# Altium PCB PCB-MAKEY_MAKEY_PTITTEAM_v1.0.PcbDoc
Units mil, origin at the board's own origin, x right, y up, seen from the top; angles counter-clockwise.
Board outline 3543.31 x 1968.5 mil, 2 copper layers (Top Layer, Bottom Layer); 48 components, 59 nets, 150 pads, 24 vias.
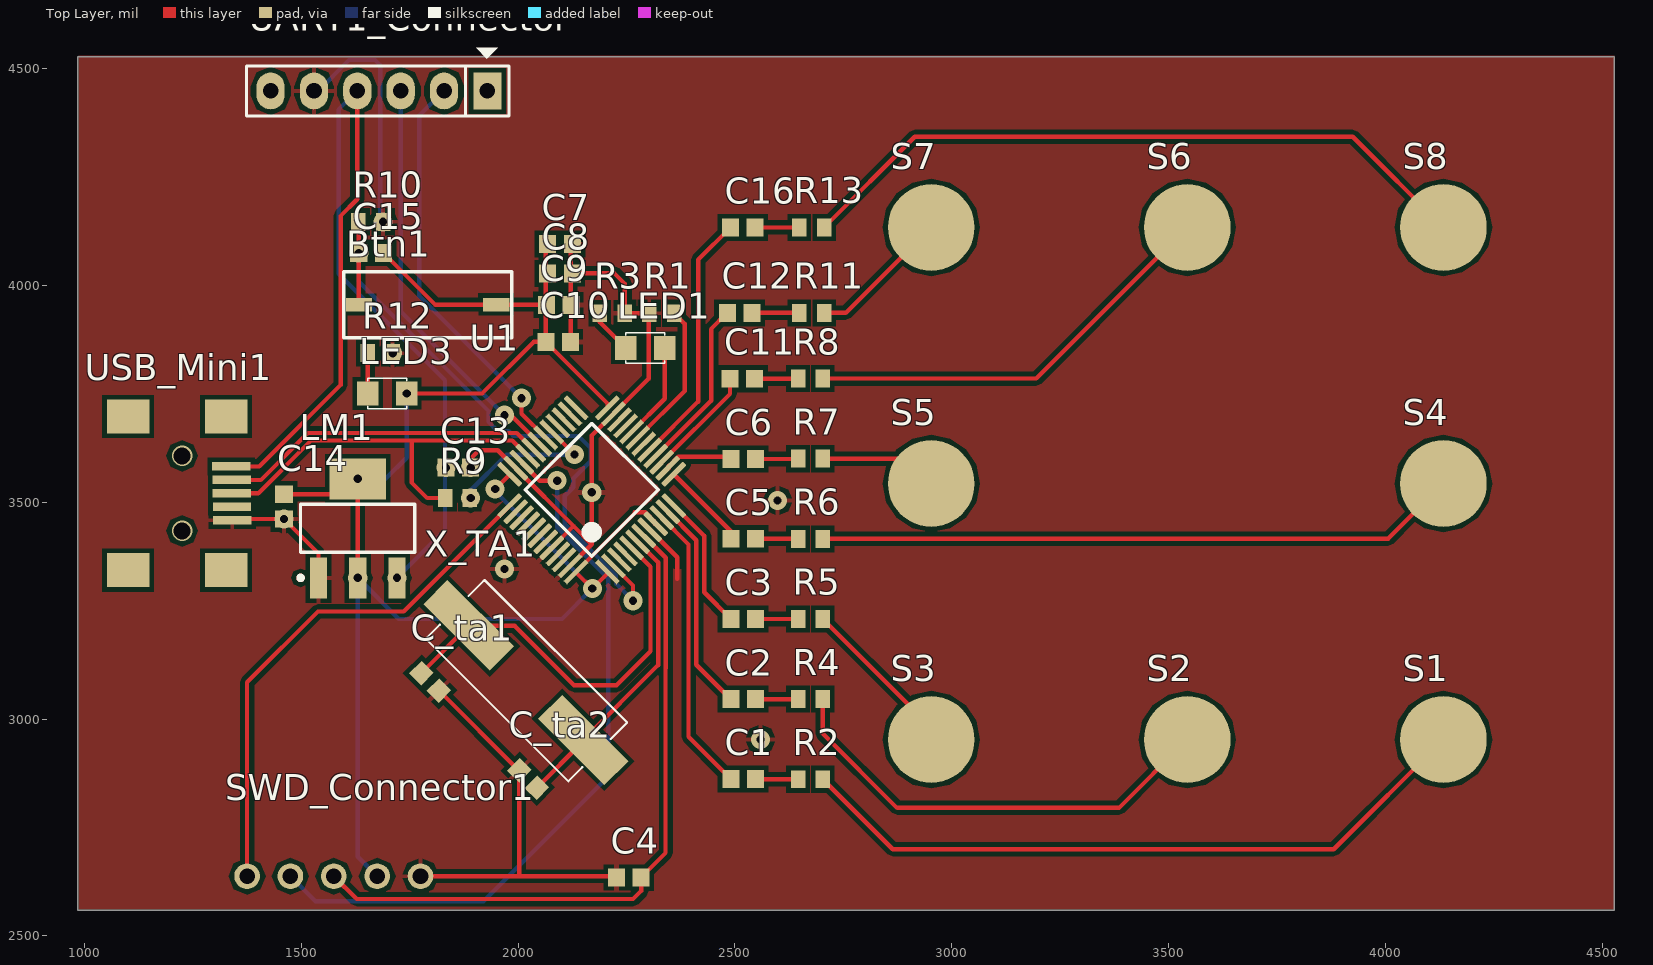
[diagram p0: Top Layer view]
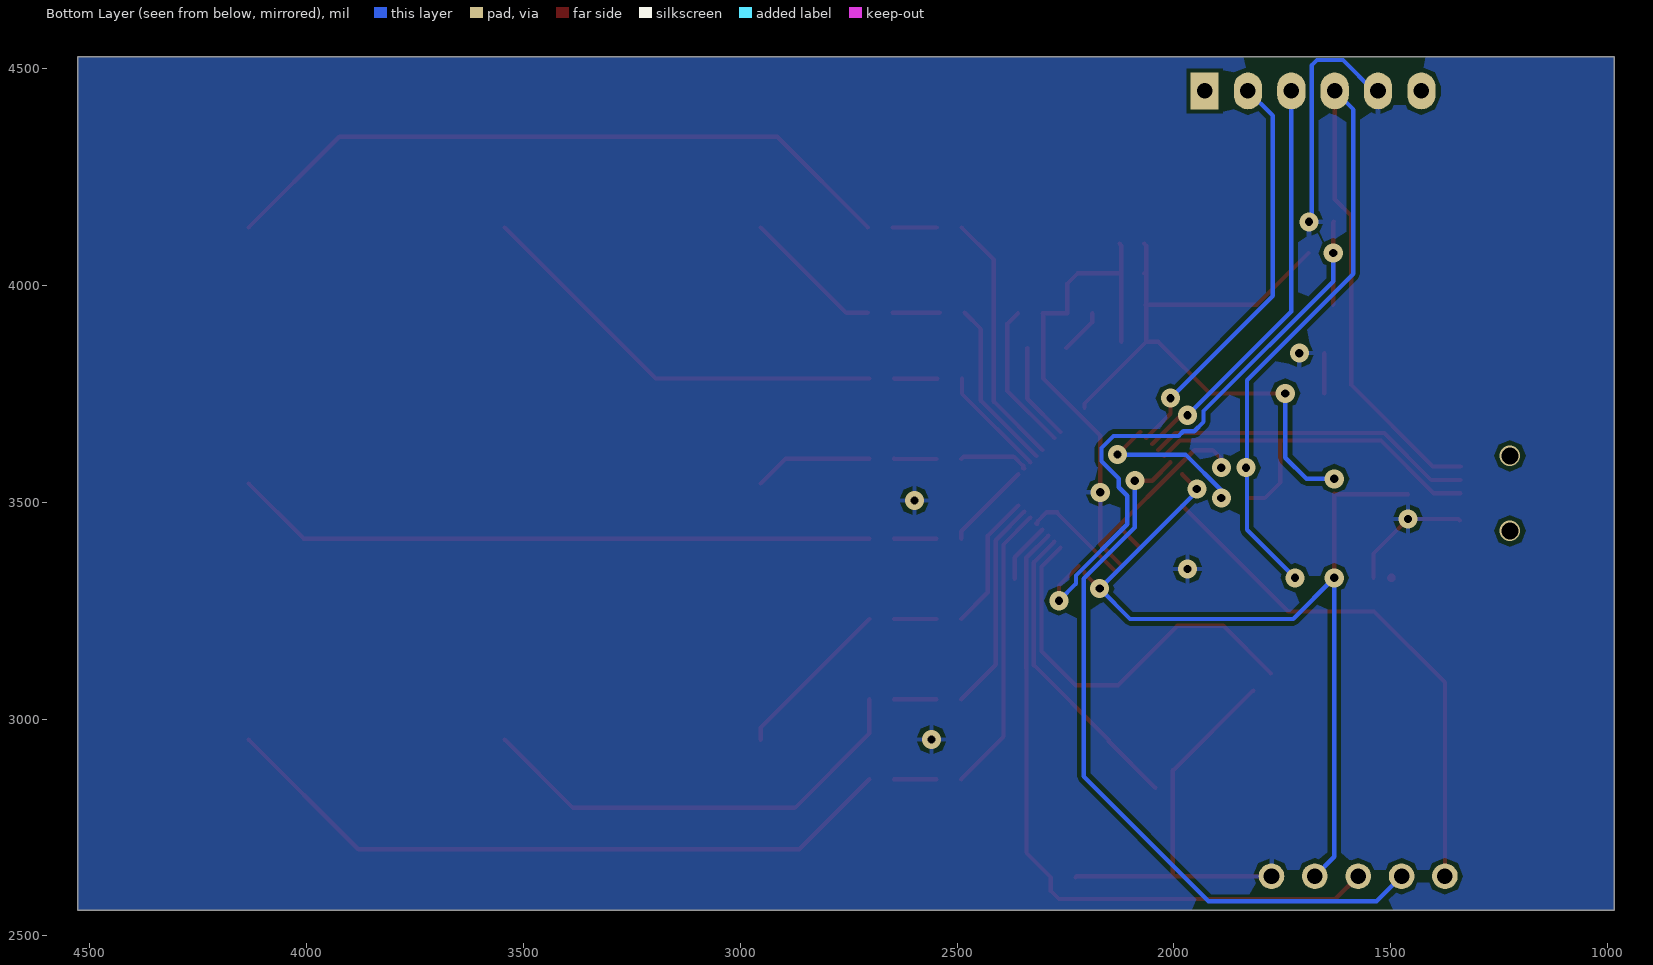
[diagram p1: Bottom Layer view, seen from below]
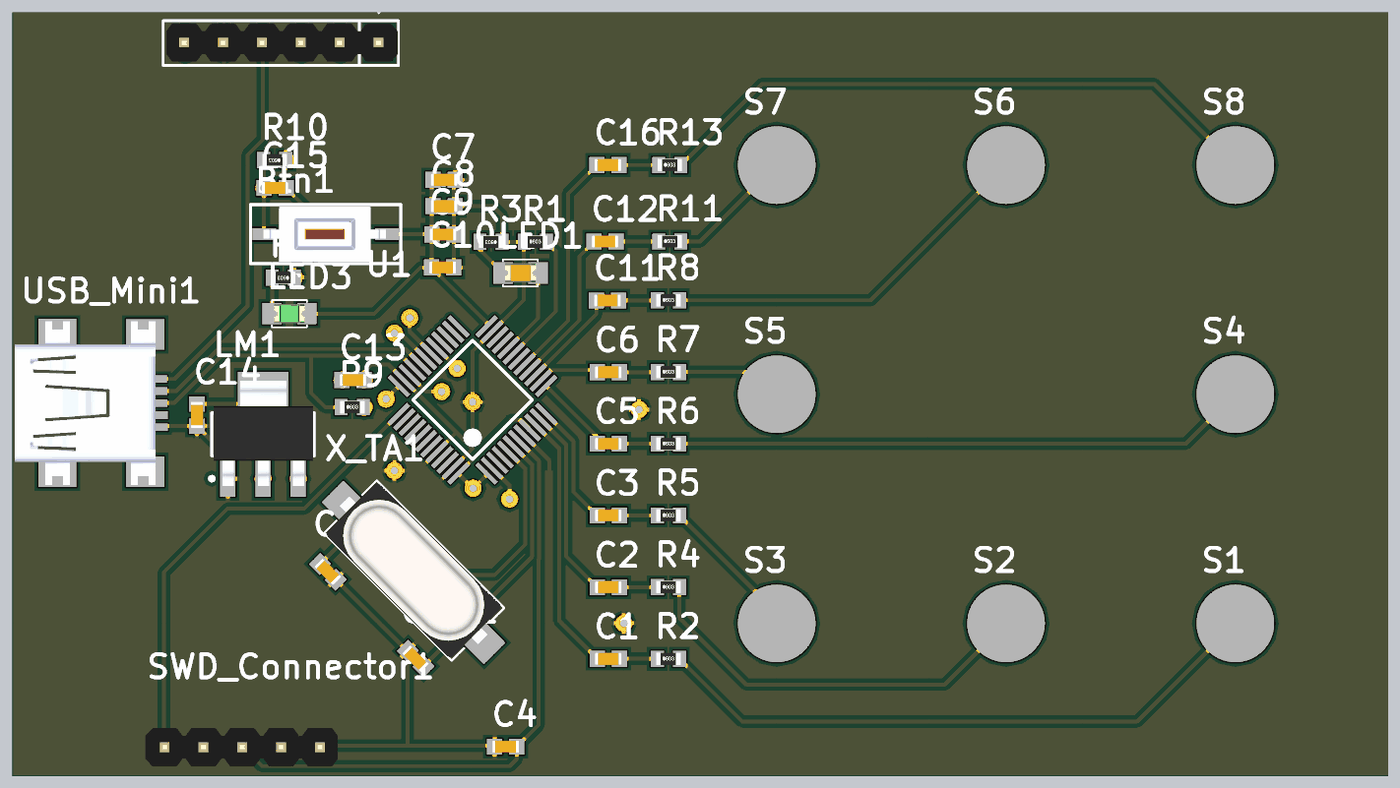
[diagram p2: 3D render of the assembled board from above, using the file's embedded part models]

## Layer stack, top to bottom
Top Solder: solder mask 0.4, Solder Resist, Dk 3.5
Top Layer: signal copper 1.4
Dielectric1: dielectric 12.6, FR-4, Dk 4.8
Bottom Layer: signal copper 1.4
Bottom Solder: solder mask 0.4, Solder Resist, Dk 3.5

## Board outline
984.25,4527.56 984.25,2559.06 4527.56,2559.06 4527.56,4527.56 984.25,4527.56

## Design rules (kind name [scope] priority, off if disabled: settings)
Clearance [All] p1: gap=10 except(7: Arc-Arc Arc-SMDPad Track-SMDPad SMDPad-SMDPad; 7.5: Arc-Track Track-Track)
PolygonConnect [All] p1: connectstyle=Relief reliefconductorwidth=10 reliefentries=4 polygonreliefangle="90 Angle" airgapwidth=10
RoutingVias [All] p1: holewidth=28 width=50 viastyle="Through Hole" minholewidth=28 minwidth=50 maxholewidth=28 maxwidth=50
SolderMaskExpansion [All] p1: expansion=4
Width [All] p1: maxlimit=10 minlimit=10 preferedwidth=10
30 further rules are at their usual default settings.

## Components (designator, comment, footprint, x,y, rotation, side; value= is the part's Value field where it differs from the comment)
Btn1 "Function" Button_SMD_2pin 1791,3956 r0 top
C1 "104" CAP_SMD_0603 2519,2861.68 r0 top
C2 "104" CAP_SMD_0603 2519,3046 r0 top
C3 "104" CAP_SMD_0603 2519,3231 r0 top
C4 "104" CAP_SMD_0603 2255,2635 r180 top
C5 "104" CAP_SMD_0603 2519,3416 r0 top
C6 "104" CAP_SMD_0603 2519,3600 r0 top
C7 "1uF" CAP_SMD_0603 2096.46,4096 r180 top
C8 "1uF" CAP_SMD_0603 2096.46,4028 r0 top
C9 "1uF" CAP_SMD_0603 2093.46,3955 r180 top
C10 "1uF" CAP_SMD_0603 2092.46,3870 r0 top
C11 "104" CAP_SMD_0603 2517,3785 r0 top
C12 "104" CAP_SMD_0603 2511,3937 r0 top
C13 "104" CAP_SMD_0603 1862,3580 r180 top
C14 "104" CAP_SMD_0603 1460,3490 r90 top
C15 "104" CAP_SMD_0603 1661,4075 r0 top
C16 "104" CAP_SMD_0603 2518,4134 r0 top
C_ta1 "22pF" CAP_SMD_0603 1797,3086 r315 top
C_ta2 "22pF" CAP_SMD_0603 2023,2862 r135 top
LED1 "color" LED_SMD_0805_Orange 2338,3856 r180 top
LED3 "color" LED_SMD_0805_Green 1743,3751 r180 top
LM1 "LM1117" SOT223-4N 1630,3440 r90 top
R1 "0R" Res_SMD_0603 2331,3936 r0 top
R2 "0R" Res_SMD_0603 2673.99,2861.3 r0 top
R3 "1k2" Res_SMD_0603 2217,3936 r180 top
R4 "0R" Res_SMD_0603 2673.99,3046.12 r0 top
R5 "0R" Res_SMD_0603 2673.99,3230.95 r0 top
R6 "0R" Res_SMD_0603 2673.99,3415.77 r0 top
R7 "0R" Res_SMD_0603 2673.99,3600.59 r0 top
R8 "0R" Res_SMD_0603 2673.99,3785.42 r0 top
R9 "1k5" Res_SMD_0603 1860,3510 r0 top
R10 "10k" Res_SMD_0603 1660,4147 r180 top
R11 "0R" Res_SMD_0603 2677.17,3937.01 r0 top
R12 "1k2" Res_SMD_0603 1682,3844 r180 top
R13 "0R" Res_SMD_0603 2677.17,4133.86 r0 top
S1 "C_Sensor" SOP2 4133.86,2952.76 r0 top
S2 "C_Sensor" SOP2 3543.31,2952.76 r0 top
S3 "C_Sensor" SOP2 2952.76,2952.76 r0 top
S4 "C_Sensor" SOP2 4133.86,3543.31 r0 top
S5 "C_Sensor" SOP2 2952.76,3543.31 r0 top
S6 "C_Sensor" SOP2 3543.31,4133.86 r0 top
S7 "C_Sensor" SOP2 2952.76,4133.86 r0 top
S8 "C_Sensor" SOP2 4133.86,4133.86 r0 top
SWD_Connector1 "" JP_5 1574.8,2637.8 r0 top
U1 "STM32F103C8T6" LQFP48_N 2169.71,3528.71 r135 top
UART1_Connector "Connector" JP6 1929.13,4448.82 r180 top
USB_Mini1 "" Micro_USB 1338.58,3582.68 r270 top
X_TA1 "8Mhz" Xtal_SMD 2018,3084.17 r135 top

## Footprints (in the part's own frame and the unit in brackets; to place one, negate y for a bottom-side part, rotate by r counter-clockwise, add the part's x,y. Pads: shape width x height; smd on the part's side, far side on the other; paste and mask are expansions set on the pad)
Button_SMD_2pin [mm] "Button smd 2pin"
  rect 1.55x0.8 smd: 1(-4.013,0) 2(4.013,0)
  silkscreen extent -4.9,-1.93 4.93,1.93, body extent -4.05,-1.8 3.95,1.8, height 2.53
CAP_SMD_0603 [mm] "Chip Capacitor 0603"
  rect 1x1.05 smd: 1(-0.725,0) 2(0.725,0)
  body extent -0.87,-0.4 0.87,0.4, height 0.85
JP6 [mil] "JP6"
  rect 65x85 hole 36: 1(0,0)
  oval 65x85 hole 36: 2(100,0) 3(200,0) 4(300,0) 5(400,0) 6(500,0)
  silkscreen extent -50,-99 556,58, body extent -48,-50 548,48, height 323
JP_5 [mm]
  round 1.5 hole 0.914: 1(-5.08,0) 2(-2.54,0) 3(0,0) 4(2.54,0) 5(5.08,0)
  body extent -6.3,-1.36 6.3,1.14, height 8.22
LED_SMD_0805_Green [mil]
  rect 50x55 smd: 1(0,0) 2(90,0)
  silkscreen extent 0,-35 90,35, body extent 5,-25 85,25, height 43
LED_SMD_0805_Orange [mil]
  rect 50x55 smd: 1(0,0) 2(90,0)
  silkscreen extent 0,-35 90,35, body extent 5,-25 85,25, height 43
LQFP48_N [mm] "Thin QFP, 48-Leads, Body 7x7mm, Pitch 0.5mm, IPC Medium Density"
  rrect25% 1.8x0.297 smd: 1(-4.05,2.75) 2(-4.05,2.25) 3(-4.05,1.75) 4(-4.05,1.25) 5(-4.05,0.75) 6(-4.05,0.25) 7(-4.05,-0.25) 8(-4.05,-0.75) 9(-4.05,-1.25) 10(-4.05,-1.75) 11(-4.05,-2.25) 12(-4.05,-2.75) 25(4.05,-2.75) 26(4.05,-2.25) 27(4.05,-1.75) 28(4.05,-1.25) 29(4.05,-0.75) 30(4.05,-0.25) 31(4.05,0.25) 32(4.05,0.75) 33(4.05,1.25) 34(4.05,1.75) 35(4.05,2.25) 36(4.05,2.75)
  rrect25% 0.297x1.8 smd: 13(-2.75,-4.05) 14(-2.25,-4.05) 15(-1.75,-4.05) 16(-1.25,-4.05) 17(-0.75,-4.05) 18(-0.25,-4.05) 19(0.25,-4.05) 20(0.75,-4.05) 21(1.25,-4.05) 22(1.75,-4.05) 23(2.25,-4.05) 24(2.75,-4.05) 37(2.75,4.05) 38(2.25,4.05) 39(1.75,4.05) 40(1.25,4.05) 41(0.75,4.05) 42(0.25,4.05) 43(-0.25,4.05) 44(-0.75,4.05) 45(-1.25,4.05) 46(-1.75,4.05) 47(-2.25,4.05) 48(-2.75,4.05)
  silkscreen extent -2.75,-2.75 2.75,2.75, body extent -3.5,-3.5 3.5,3.5, height 1.6
Micro_USB [mm] "Micro usb connector"
  rect 2x2.5 smd: 0(-2.929,-6.045) 0(-2.925,-0.305) 0(6.071,-6.045) 0(6.075,-0.305)
  rect 0.5x2.25 smd: 1(0,0) 2(0.787,0.013) 3(1.575,0.025) 4(2.362,0.038) 5(3.15,0.051)
  body extent -3.78,-8.83 6.92,0.37, height 3.95
Res_SMD_0603 [mm] "Resistor smd 0603 type"
  rect 0.85x1.05 smd: 1(-0.725,0) 2(0.725,0)
  body extent -0.8,-0.41 0.8,0.41, height 0.45
SOP2 [mil]
  round 200 smd: 1(0,0)
SOT223-4N [mm]
  rect 2.4x1 smd: 1(-2.9,2.3) 2(-2.9,0) 3(-2.9,-2.3)
  rect 2.4x3.3 smd: 4(2.9,0)
  Top Layer circle w0.25: c-2.9,3.35 r0.125
  silkscreen extent -3.02,-3.35 1.4,3.47, body extent -3.39,-3.27 3.5,3.23, height 1.72
Xtal_SMD [mm] "Crystal smd"
  rect 5.5x2 smd: 1(-4.75,0) 2(4.75,0)
  silkscreen extent -5.84,-2.54 5.97,2.32, body extent -6.3,-2.51 6.5,2.32, height 4.3

## Part data
Btn1: library part Button_SMD_2pin, "Switch button 2 pin"
C1 C2 C3 C4 C5 C6 C9 C10 C11 C13 C14 C15: library part CM, "Cap SMD"
C7 C8 C12 C16 C_ta1 C_ta2: library part CN0, "Cremic For Xtal 1pF => 100pF"
LED1 LED3: library part Led_SMD, "Led smd"
LM1: "3v3"
R1 R2 R3 R4 R5 R6 R7 R8 R10 R11 R12 R13: library part Res_SMD_0603, "Resistor smd 0603 type"
R9: library part R, "Resistor 1/4W"
SWD_Connector1: library part Load_Program
U1: "STM32 ARM-based 32-bit MCU with 64 Kbytes Flash, 48-pin LQFP, Industrial Temperature"
UART1_Connector: library part USB2Com_Conn, "Connector to USB2Com module"
USB_Mini1: library part USB_M
X_TA1: library part XT2, "Crystal For all Crystal 2pin."

## Via types
v1: diameter 44, hole 19, Top Layer to Bottom Layer, 22 vias
v2: diameter 47.24, hole 39.37, Top Layer to Bottom Layer, tented both sides, 2 vias

## Nets (pads, with @x,y where several pads share a name; then routed paths per layer and width w, separated by ;. In a path a pad name is that pad's centre, name@x,y a point inside that pad or via, vN(x,y) a via of type N, cw(c..) or ccw(c..) an arc to the next point about the centre after c; other vN are vias at no path point)
GND: C4.2 C7.1 C8.2 C9.1 C10.2 C13.1 C14.1 C_ta1.2 C_ta2.2 LM1.1 R1.1 R3.1 R10.1 R12.1 SWD_Connector1.5 U1.8 U1.23 U1.35 U1.44 U1.47 UART1_Connector.5 USB_Mini1.5 | length 3553.7
  Top Layer w10: USB_Mini1.5 1343.36,3461.46 v1(1460,3461.46) 1539.45,3382.01 LM1.1 ; SWD_Connector1.5 2000,2637.8 ; C_ta1.2@1817.01,3065.65 C_ta1.2 2000.82,2882.18 C_ta2.2 2002.65,2882.01 2002.65,2640.44 2000,2637.8 ; C13.1@1888.54,3598.54 1910,3620 1953.14,3620 U1.35 2130,3443.14 ; v1(1890.54,3580) C13.1@1890.54,3598.54 ; U1.44 2127.95,3445.19 2169.71,3403.43 ; U1.47 2169.71,3403.43 ; C10.2 2121,4092 C7.1 C7.1@2125,4096.24 ; C8.2 2222,4028 2245.54,4004.46 R3.1 R1.1 2301,3934.54 2301,3785.27 U1.23 2169.71,3653.98 2169.71,3403.43 ; C4.2 2223.66,2637.8 2000,2637.8 ; U1.8 2367,3373.17 2367,3324
  Bottom Layer w10: UART1_Connector.5 1538.82,4448.82 1610,4520 1670,4520 1681.63,4508.37 1681.63,4153.9 v1(1688.54,4147)
  other v1: 2559.06,2952.76 1968.5,3346.46 2598.43,3503.94 2169.71,3523 1710.54,3844
NetC1_2: C1.2 R2.1 | length 98.1
  Top Layer w10: C1.2 2645.08,2861.68 R2.1
NetC2_2: C2.2 R4.1 | length 98
  Top Layer w10: C2.2 2645.33,3046 R4.1
NetC3_2: C3.2 R5.1 | length 97.9
  Top Layer w10: C3.2 2645.4,3231 R5.1
NetC5_2: C5.2 R6.1 | length 98
  Top Layer w10: C5.2 2645.23,3416 R6.1
NetC6_2: C6.2 R7.1 | length 98.2
  Top Layer w10: C6.2 2644.86,3600 R7.1
NetC11_2: C11.2 R8.1 | length 100.1
  Top Layer w10: C11.2 2645.03,3785 R8.1
NetC12_2: C12.2 R11.1 | length 109.1
  Top Layer w10: C12.2 R11.1
NetC16_2: C16.2 R13.1 | length 102.1
  Top Layer w10: C16.2 2648.49,4134 R13.1
NetLED1_2: LED1.2 R3.2 | length 104.7
  Top Layer w10: R3.2 2188.45,3915.55 LED1.2
NetLED3_2: LED3.2 R12.2 | length 93.2
  Top Layer w10: LED3.2 1653.45,3751.45 R12.2
NetR2_2: R2.2 S1.1 | length 1602.8
  Top Layer w10: R2.2 2863.84,2700 3881.1,2700 S1.1
NetR4_2: R4.2 S2.1 | length 1056.4
  Top Layer w10: R4.2 2702.54,2966.75 2874.02,2795.28 3385.83,2795.28 S2.1
NetR5_2: R5.2 S3.1 | length 381.8
  Top Layer w10: R5.2 2952.76,2980.73 S3.1
NetR6_2: R6.2 S4.1 | length 1484.1
  Top Layer w10: R6.2 4006.32,3415.77 S4.1
NetR7_2: R7.2 S5.1 | length 273.9
  Top Layer w10: R7.2 2895.47,3600.6 S5.1
NetR8_2: R8.2 S6.1 | length 985.1
  Top Layer w10: R8.2 3194.87,3785.42 S6.1
NetR11_2: R11.2 S7.1 | length 328.6
  Top Layer w10: R11.2 2755.91,3937.01 S7.1
NetR13_2: R13.2 S8.1 | length 1601.4
  Top Layer w10: R13.2 2914.85,4343 3924.72,4343 S8.1
NRST: C4.1 SWD_Connector1.3 U1.7 | length 1602.3
  Top Layer w10: SWD_Connector1.3 1627.6,2585 2265,2585 2283.54,2603.54 C4.1 2340,2691.46 2340,3116.62 2340.33,3116.95 2340.33,3372 U1.7
OSC_IN: C_ta1.1 U1.5 X_TA1.2 | length 919.8
  Top Layer w10: C_ta1.1 1885.77,3215.13 1991.87,3215.13 2129,3078 2227,3078 2305.33,3156.33 2305.33,3351.32 U1.5
OSC_OUT: C_ta2.1 U1.6 X_TA1.1 | length 702.6
  Top Layer w10: C_ta2.1 2150.23,2948.87 X_TA1.1 2322.83,3124.54 2322.83,3361.66 U1.6
PA0: C1.1 U1.10 | length 669
  Top Layer w10: U1.10 2393,3402.85 2393,2959.13 C1.1
PA1: C2.1 U1.11 | length 492.8
  Top Layer w10: U1.11 2411,3412.69 2411,3125.46 C2.1
PA2: C3.1 U1.12 | length 316
  Top Layer w10: U1.12 2429,3422.53 2429,3292.46 C3.1
PA3: C5.1 U1.13 | length 203.3
  Top Layer w10: U1.13 2490.46,3433.45 C5.1
PA4: C6.1 U1.14 | length 161.7
  Top Layer w10: U1.14 2347.7,3578.82 2347.7,3584.03 2369.15,3605.48 2484.98,3605.48 C6.1
PA5: C11.1 U1.15 | length 257.4
  Top Layer w10: U1.15 2488.46,3750.02 C11.1
PA6: C12.1 U1.16 | length 398.8
  Top Layer w10: U1.16 2445,3734.4 2445,3899.54 C12.1
PA7: C16.1 U1.17 | length 590.5
  Top Layer w10: U1.17 2415,3732.24 2415,4059.54 C16.1
PA13: SWD_Connector1.2 U1.34 | length 1707.3
  Top Layer w10: U1.34 2008.24,3591.76 2050,3550 v1(2090,3550)
  Bottom Layer w10: SWD_Connector1.2 1532.6,2580 1920,2580 2208,2868 2208,3324 2090,3442 v1(2090,3550)
PA14: SWD_Connector1.1 U1.37 | length 1221.5
  Top Layer w10: SWD_Connector1.1 1374.8,3084.8 1538.4,3248.4 1736.28,3248.4 U1.37
PA15: U1.38
PB0: U1.18
PB1: R1.2 U1.19 | length 342.7
  Top Layer w10: U1.19 2384,3756.92 2384,3911.55 R1.2
PB2: LED1.1 U1.20 | length 225.3
  Top Layer w10: U1.20 2338,3738.76 LED1.1
PB3: U1.39
PB4: U1.40
PB5: U1.41
PB6: U1.42
PB7: U1.43
PB8: U1.45
PB9: U1.46
PB10: U1.21
PB11: U1.22
PB12: U1.25
PB13: U1.26
PB14: U1.27
PB15: U1.28
PC13: Btn1.1 C15.1 R10.2 U1.2 | length 1506.7
  Top Layer w10: R10.2 1632.46,4145.99 v1(1632.46,4075) 1632.46,3956.54 Btn1.1 ; U1.2 2265,3308.14 v1(2265,3273)
  Bottom Layer w10: v1(1632.46,4075) 1632.46,4009.54 1931.5,3710.5 1931.5,3685.46 1953.18,3663.79 1978.21,3663.79 1989,3653 2139.33,3653 2167,3625.33 2167,3594.67 2127,3554.67 2127,3534.67 2107.5,3515.17 2107.5,3449.25 2225.5,3331.25 2225.5,3312.5 v1(2265,3273)
PC14: U1.3
PC15: U1.4
USART1_RX: U1.31 UART1_Connector.3 | length 956.1
  Top Layer w10: v1(1968.5,3700.79) 1983.71,3700.79 U1.31
  Bottom Layer w10: UART1_Connector.3 1729.13,3940.16 v1(1968.5,3700.79)
USART1_TX: U1.30 UART1_Connector.2 | length 945.3
  Top Layer w10: v1(2007.87,3740.16) 2007.87,3704.46 U1.30
  Bottom Layer w10: UART1_Connector.2 1771.65,4391.34 1771.65,3976.38 v1(2007.87,3740.16)
USB_5V: C13.2 LM1.3 UART1_Connector.4 USB_Mini1.1 | length 2312.5
  Top Layer w10: USB_Mini1.1 1402.68,3582.68 1590.49,3770.49 1590.49,4160.4 1629.13,4199.05 UART1_Connector.4
  Bottom Layer w10: UART1_Connector.4 1586,4405.69 1586,4027 1831.46,3781.54 1831.46,3436.73 v1(1720.55,3325.83)
  other v1: 1833.46,3580
USB_DISC: R9.2 U1.29 | length 365.9
  Top Layer w10: U1.29 2077.84,3662.16 v1(2130,3610)
  Bottom Layer w10: v1@1888.55,3510 1888.55,3525.55 1973,3610 v1(2130,3610)
  other v1: 1890.55,3510
USBDM: U1.32 USB_Mini1.2 | length 758.2
  Top Layer w10: USB_Mini1.2 1406.68,3551.68 1515,3660 1996.66,3660 U1.32
USBDP: R9.1 U1.33 USB_Mini1.3 | length 936.6
  Top Layer w10: USB_Mini1.3 1400.43,3520.68 1522.25,3642.5 1754.28,3642.5 ; R9.1 1790,3510 1754.28,3545.72 1754.28,3642.5 ; U1.33 1986.32,3642.5 1754.28,3642.5
VCC: Btn1.2 C7.2 C8.1 C9.2 C10.1 C14.2 C15.2 LED3.1 LM1.2 LM1.4 SWD_Connector1.4 U1.1 U1.9 U1.24 U1.36 U1.48 | length 3933.7
  Top Layer w10: C14.2 1628.54,3518.54 1630,3520 v1(1630,3325.83) ; C15.2 1808.54,3956 Btn1.2 C9.2@2063.91,3956 ; v1(1743,3751) 1916.91,3751 2035.91,3870 C10.1 ; v1(1947,3531) 1980.4,3564.4 U1.36 ; C9.2 C9.2@2063.91,3956 ; C8.1 C8.1@2063.91,4028 ; C7.2 2063.91,4092 C8.1@2063.91,4028 ; U1.1 2205.9,3335.9 v1(2171,3301) 2133.52,3338.48 U1.48 2268.42,3474.31 2268.42,3477.42 2293.2,3477.42 2314.65,3455.97 2314.65,3450.76 U1.9 ; U1.24 2205.9,3727.78 2063.91,3869.76 C10.1 ; C10.1 C9.2@2063.91,3956 ; C9.2@2063.91,3956 C8.1@2063.91,4028
  Bottom Layer w10: v1(1630,3554.17) 1694.17,3554.17 1743,3603 v1(1743,3751) ; SWD_Connector1.4 1630,2682.6 v1(1630,3325.83) 1724.83,3231 2101,3231 v1(2171,3301) 1947,3525 v1(1947,3531)
pads on no net: UART1_Connector.1 UART1_Connector.6 USB_Mini1.0 USB_Mini1.4
copper on no net:
  other v2: 1225.01,3434.06 1225.01,3607.29

## Polygon pours and split planes (outlines as drawn)
GND on Bottom Layer "Bottom Layer-No Net" (solid, remove dead copper, pour order 2): 984,4527 985,4526 985,2560 4526.61,2560 4527.56,2559.06 4527.56,4527.56 984.25,4527.56
GND on Top Layer "Bottom Layer-No Net" (solid, remove dead copper, pour order 0): 984,4528 987,4525 987,2561 4528,2561 4530,2559 4528,2561 4528,4530 987,4530 986,4529